# Altium PCB OpenPLCv0.2.0_PANEL.PcbDoc
Units mm, origin at the board's own origin, x right, y up, seen from the top; angles counter-clockwise.
Board outline 405 x 285 mm, 4 copper layers (Top Copper, Int1 Copper, Int2 Copper, Bottom Copper), stack 1.57 mm thick; 3 components, 0 nets, 10 pads, 0 vias.
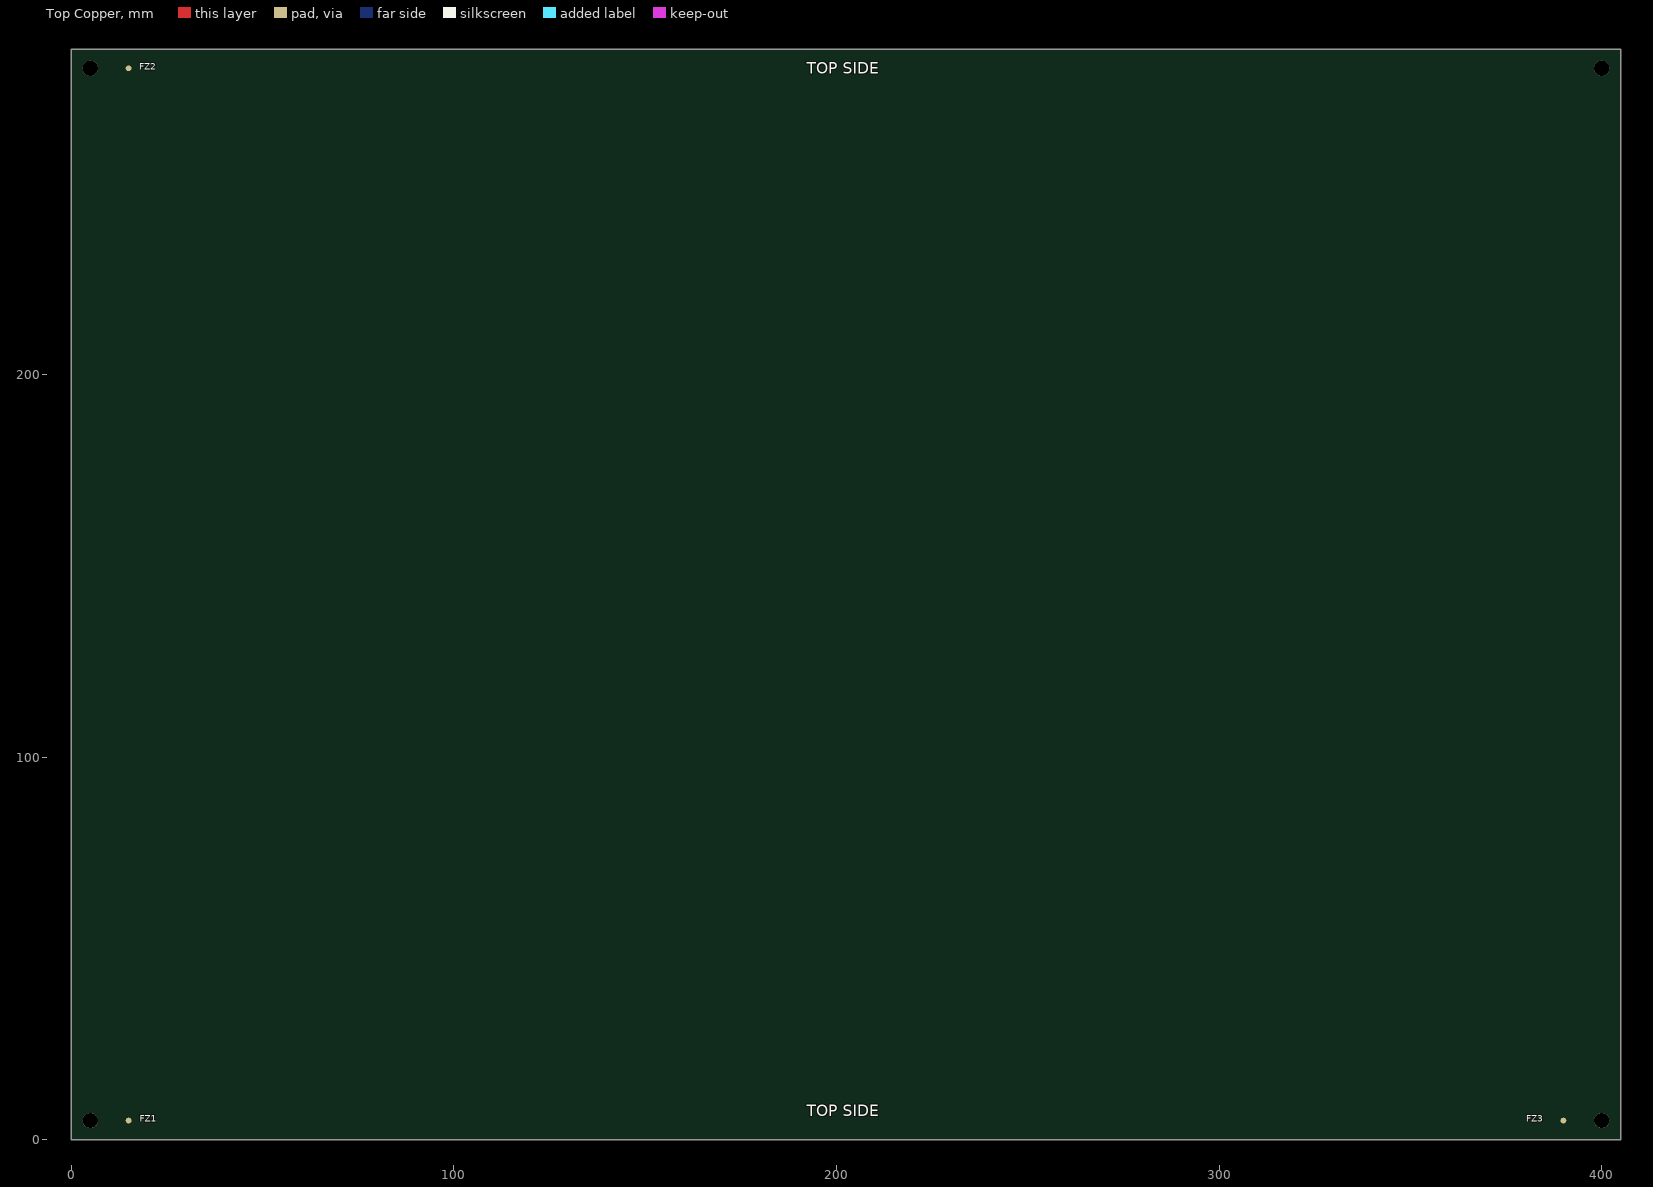
[diagram p0: Top Copper view]
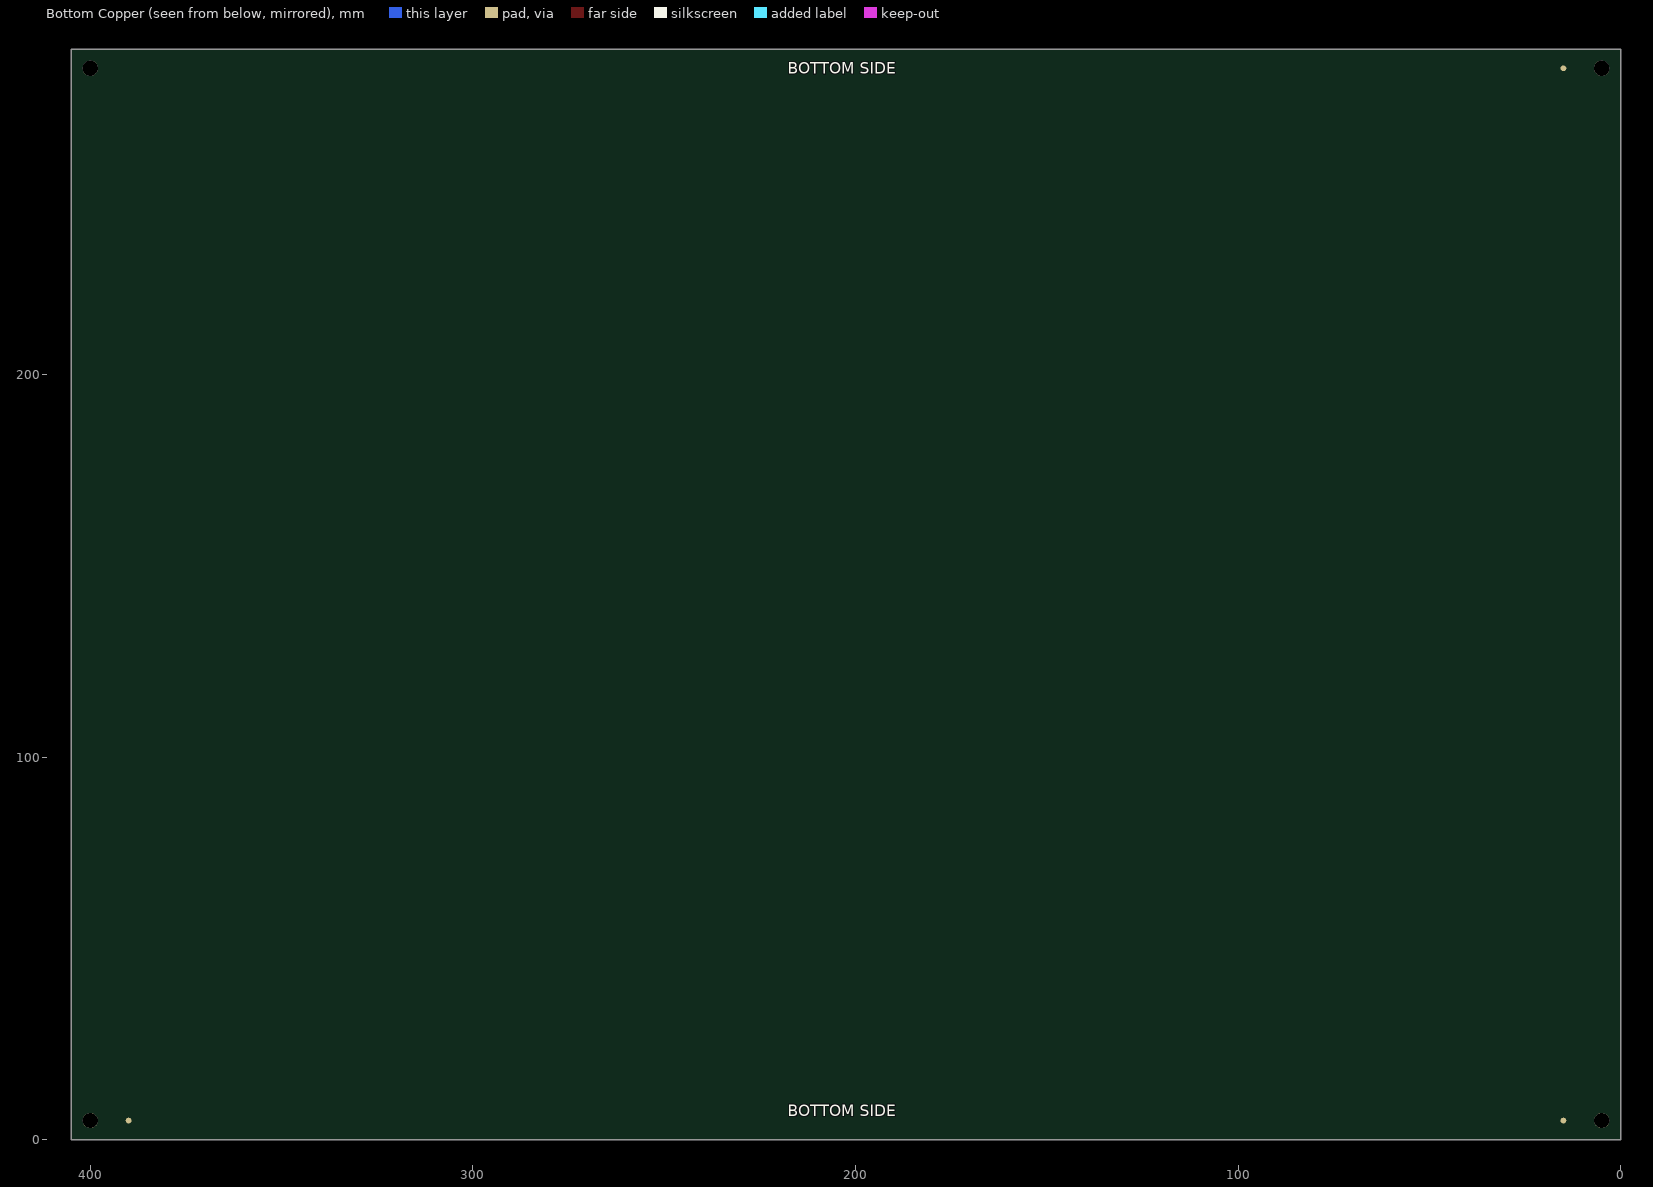
[diagram p1: Bottom Copper view, seen from below]

## Layer stack, top to bottom
Top Solder: solder mask 0.0127, SM-001, Dk 3.8
Top Copper: signal copper 0.035
Dielectric 2: prepreg 0.1, PP-2313, Dk 4.05
Int1 Copper: signal copper 0.0175
Dielectric 6: core 1.265, Core, Dk 4.3
Int2 Copper: signal copper 0.0175
Dielectric 7: prepreg 0.1, PP-2313, Dk 4.05
Bottom Copper: signal copper 0.035
Bottom Solder: solder mask 0.0127, SM-001, Dk 3.8

## Board outline
0,0 0,285 405,285 405,0

## Design rules (kind name [scope] priority, off if disabled: settings)
Clearance [All] p1: gap=0.254 ignorepadtopadclearanceinfootprint=FALSE except(0: Arc-Hole Track-Hole SMDPad-Hole THPad-Hole Via-Hole Fill-Hole Poly-Hole Region-Hole Text-Hole)
PolygonConnect [All] p1: connectstyle=Relief reliefconductorwidth=0.254 reliefentries=4 polygonreliefangle="90 Angle" airgapwidth=0.254
RoutingVias [All] p1: holewidth=0.711 width=1.27 viastyle="Through Hole" minholewidth=0.711 minwidth=1.27 maxholewidth=0.711 maxwidth=1.27
SolderMaskExpansion [All] p1: expansion=0.102 istentingtop=FALSE
Width [All] p1: maxlimit=0.254 minlimit=0.254 preferedwidth=0.254
30 further rules are at their usual default settings.

## Components (designator, comment, footprint, x,y, rotation, side; value= is the part's Value field where it differs from the comment)
FZ1 "Comment" Fiducial 15,5 r0 top
FZ2 "Comment" Fiducial 15,280 r0 top
FZ3 "Comment" Fiducial 390,5 r0 top

## Footprints (in the part's own frame and the unit in brackets; to place one, negate y for a bottom-side part, rotate by r counter-clockwise, add the part's x,y. Pads: shape width x height; smd on the part's side, far side on the other; paste and mask are expansions set on the pad)
Fiducial [mm]
  round 1.5 smd paste-2539.97 mask+0.65: FID(0,0)
  round 1.5 smd far side paste-2539.97 mask+0.65: FID(0,0)

## Free pads (board coordinates)
  round 4 hole 4 unplated: TOOL(5,5) TOOL(5,280) TOOL(400,5) TOOL(400,280)

## Nets (pads, with @x,y where several pads share a name; then routed paths per layer and width w, separated by ;. In a path a pad name is that pad's centre, name@x,y a point inside that pad or via, vN(x,y) a via of type N, cw(c..) or ccw(c..) an arc to the next point about the centre after c; other vN are vias at no path point)
pads on no net: FZ1.FID FZ2.FID FZ3.FID

## Silkscreen, mask and mechanical layers (free items; w line width, h text height)
Top Overlay:
  text "TOP SIDE" at 192.215,277.559 h5
  text "TOP SIDE" at 192.215,5.059 h5
Bottom Overlay:
  text "BOTTOM SIDE" at 217.767,277.559 h5
  text "BOTTOM SIDE" at 217.767,5.059 h5
Panel Outline:
  the board outline again, w1

## Panel: embedded boards
"OpenPLCv0.2.0.PcbDoc" at 15,15, 2 rows x 2 columns, spacing 135 x 195, rotation 0